# EAGLE board AUVfirstdraft (EAGLE 9.1.2)

Size 254 x 254 mm. Coordinates in mm from the lower left corner, seen from the top.
Outline: 0,0 254,0 254,254 0,254 0,0
Copper layers (1*16): Top 0.035mm / dielectric 1.5mm / Bottom 0.035mm
Design rules "default": minimum track width 6mil, minimum drill 0.35mm, track to track 6mil, track to pad 6mil, pad to pad 6mil, via to via 6mil, smd to smd 6mil, copper to edge 40mil, drill to drill 6mil, minimum pad ring 10mil, minimum via ring 8mil, stop-mask expansion 4mil, vias tented up to drill 0mil, thermal gap 10mil

## Footprints (pad centres in the part's own frame; a part is rotated, then mirrored left to right if it is on the bottom)
0204/7 = drill 0.813 long: 1 -3.81,0; 2 3.81,0
TO220V = drill 1.016 long: 1 -2.54,-2.54; 2 0,-2.54; 3 2.54,-2.54
2X05 = drill 1.016 offset: 1 -5.08,-1.27; 2 -5.08,1.27; 3 -2.54,-1.27; 4 -2.54,1.27; 5 0,-1.27; 6 0,1.27; 7 2.54,-1.27; 8 2.54,1.27; 9 5.08,-1.27; 10 5.08,1.27
DC-DC-STEP-DOWN-LM2596 = drill 1.5 pad 2.5 long: IN+ -19.812,8.636; IN- -19.812,-8.636; OUT+ 19.812,8.636; OUT- 19.812,-8.636 | hole 3: -14.478,7.62; 15.24,-7.62
C025-024X044 = drill 0.813 long: 1 -1.27,0; 2 1.27,0
DO41-10 = drill 1.118 pad 1.93 long: A 5.08,0; C -5.08,0
1X04 = drill 1.016 long: 1 -3.81,0; 2 -1.27,0; 3 1.27,0; 4 3.81,0
1X02 = drill 1.016 long: 1 -1.27,0; 2 1.27,0
LED3MM = drill 0.813 pad 1.676 long: A -1.27,0; K 1.27,0
LED5MM = drill 0.813 pad 1.676 long: A -1.27,0; K 1.27,0
TO220V' = drill 1.016 long: 1 -2.54,0; 2 0,0; 3 2.54,0
TSOP3XXX = drill 1 pad 1.93 long: 1 -2.54,0; 2 0,0; 3 2.54,0
DIGITAL_ISOLATOR_MODULE = drill 0.9 pad 1.778 long: 1 2.54,25.4; 2 2.54,22.86; 3 2.54,20.32; 4 2.54,17.78; 5 2.54,15.24; 6 2.54,12.7; 7 2.54,10.16; 8 2.54,7.62; 9 2.54,5.08; 10 2.54,2.54; 11 20.32,2.54; 12 20.32,5.08; 13 20.32,7.62; 14 20.32,10.16; 15 20.32,12.7; 16 20.32,15.24; 17 20.32,17.78; 18 20.32,20.32; 19 20.32,22.86; 20 20.32,25.4
DEANS = drill 1.27 pad 3.556 long: + 0,0; - 0.737,-6.921
1X03 = drill 1.016 long: 1 -2.54,0; 2 0,0; 3 2.54,0
L298MODULE = drill 1.016 pad 1.88 long: 12V 8.89,6.35; 12V1 8.89,1.27; GND 13.97,6.35; GND1 13.97,1.27 | drill 1.016 pad 1.88 offset: IN1 26.67,5.08; IN2 29.21,5.08; IN3 31.75,5.08; IN4 34.29,5.08; IN5 26.67,1.27; IN6 29.21,1.27; IN7 31.75,1.27; IN8 34.29,1.27
1X08 = drill 1.016 long: 1 -8.89,0; 2 -6.35,0; 3 -3.81,0; 4 -1.27,0; 5 1.27,0; 6 3.81,0; 7 6.35,0; 8 8.89,0
2X08 = drill 1.016 offset: 1 -8.89,-1.27; 2 -8.89,1.27; 3 -6.35,-1.27; 4 -6.35,1.27; 5 -3.81,-1.27; 6 -3.81,1.27; 7 -1.27,-1.27; 8 -1.27,1.27; 9 1.27,-1.27; 10 1.27,1.27; 11 3.81,-1.27; 12 3.81,1.27; 13 6.35,-1.27; 14 6.35,1.27; 15 8.89,-1.27; 16 8.89,1.27
1X15 = drill 1.016 long: 1 -17.78,0; 2 -15.24,0; 3 -12.7,0; 4 -10.16,0; 5 -7.62,0; 6 -5.08,0; 7 -2.54,0; 8 0,0; 9 2.54,0; 10 5.08,0; 11 7.62,0; 12 10.16,0; 13 12.7,0; 14 15.24,0; 15 17.78,0
DIL04 = drill 0.813 offset: 1 -1.27,-3.81; 2 1.27,-3.81; 3 1.27,3.81; 4 -1.27,3.81
TO92-EBC = drill 0.813 long: B 0,-1.27; C -2.54,-1.27; E 2.54,-1.27
TO220BV = drill 1.016 long: D 0,-2.54; G -2.54,-2.54; S 2.54,-2.54
DO35Z10 = drill 0.813 long: A 5.08,0; C -5.08,0
1X13 = drill 1.016 long: 1 -15.24,0; 2 -12.7,0; 3 -10.16,0; 4 -7.62,0; 5 -5.08,0; 6 -2.54,0; 7 0,0; 8 2.54,0; 9 5.08,0; 10 7.62,0; 11 10.16,0; 12 12.7,0; 13 15.24,0
ARDUINO_NANO_30PIN = drill 0.9 pad 1.93 long: 3V3 16.51,6.35; +5V 16.51,31.75; A0 16.51,11.43; A1 16.51,13.97; A2 16.51,16.51; A3 16.51,19.05; A4 16.51,21.59; A5 16.51,24.13; A6 16.51,26.67; A7 16.51,29.21; AREF 16.51,8.89; D0/RX 1.27,36.83; D1/TX 1.27,39.37; D2 1.27,29.21; D3 1.27,26.67; D4 1.27,24.13; D5 1.27,21.59; D6 1.27,19.05; D7 1.27,16.51; D8 1.27,13.97; D9 1.27,11.43; D10 1.27,8.89; D11 1.27,6.35; D12 1.27,3.81; D13 16.51,3.81; GND(1) 1.27,31.75; GND(2) 16.51,36.83; RST(1) 1.27,34.29; RST(2) 16.51,34.29; VIN 16.51,39.37 | hole 2: 1.27,41.91; 16.51,41.91; 16.51,1.27; 1.27,1.27
SERVO_CONTROLLER = drill 1 pad 1.93 long: 0 6.35,34.29; 1 6.35,31.75; 2 6.35,29.21; 3 6.35,26.67; 4 6.35,24.13; 5 6.35,21.59; 6 6.35,16.51; 7 6.35,13.97; 8 6.35,11.43; 9 6.35,8.89; 10 6.35,6.35; 11 6.35,3.81; +5V(OUT) 6.35,19.05; ERR 26.67,15.24; GND 26.67,27.94; RST' 26.67,17.78; RX 26.67,22.86; TX 26.67,20.32; TXIN 26.67,12.7; VIN 26.67,25.4; VSRV 6.35,1.27

## Placement (x,y rotation side)
330Ω  [0204/7]  92.71,153.67 180 top
7805_ESC  7805TV  [TO220V]  35.56,218.44 0 top
7805_NUC  7805TV  [TO220V]  64.77,209.55 0 top
7806_NUC  7805TV  [TO220V]  52.07,209.55 0 top
BATTERY_MONITERING  [2X05]  93.98,205.74 270 top
BOOST_24V_NUC  DC-DC-STEP-DOWN-LM2596  [DC-DC-STEP-DOWN-LM2596]  -25.4,64.77 0 top  (outside the outline)
BUCK_7V_ESC  DC-DC-STEP-DOWN-LM2596  [DC-DC-STEP-DOWN-LM2596]  12.7,156.21 90 top
BUCK_7V_NUC  DC-DC-STEP-DOWN-LM2596  [DC-DC-STEP-DOWN-LM2596]  -27.94,15.24 0 top  (outside the outline)
BUCK_12_NUC  DC-DC-STEP-DOWN-LM2596  [DC-DC-STEP-DOWN-LM2596]  -26.67,40.64 0 top  (outside the outline)
C1  220nF  [C025-024X044]  44.45,201.93 0 top
C2  100nF  [C025-024X044]  49.53,201.93 180 top
C3  220nF  [C025-024X044]  68.58,198.12 180 top
C4  100nF  [C025-024X044]  63.5,198.12 0 top
C5  220nF  [C025-024X044]  41.91,213.36 0 top
C6  100nF  [C025-024X044]  45.72,213.36 180 top
D1  1N4004  [DO41-10]  223.52,149.86 90 top
D6  1N4004  [DO41-10]  219.71,149.86 90 bottom
D7  1N4004  [DO41-10]  45.72,5.08 180 bottom
D8  1N4004  [DO41-10]  33.02,2.54 270 top
DEPTH_SENSOR  [1X04]  128.27,-3.81 180 top  (outside the outline)
ESC_5V_JUMPER  [1X02]  101.6,128.27 180 top
ESC_5V_LED  [LED3MM]  53.34,214.63 0 top
ESC_EMITTER_LED  [LED5MM]  128.27,38.1 90 top
ESC_PMOS  MOSFET-PCHANNELFQP27P06  [TO220V']  3.81,119.38 270 top
FRC  [2X05]  219.71,77.47 90 top
IR_RECIEVER  TSOP34X  [TSOP3XXX]  125.73,20.32 0 top
ISOLATION_CIRCUIT  DIGITAL_ISOLATOR  [DIGITAL_ISOLATOR_MODULE]  212.09,66.04 90 top
J1  [DEANS]  5.08,5.08 180 top
L298_JUMPER_1  [1X03]  198.12,191.77 270 top
L298_JUMPER_2  [1X03]  224.79,194.31 270 top
L298_MOTOR_DRIVER  L298MODULE  [L298MODULE]  215.9,162.56 90 top
LOAD_CONNECTORS  [1X08]  125.73,142.24 90 top
LOAD_NMOS_JUMPER  [2X08]  162.56,139.7 90 top
LOAD_POWER_PINS  [1X08]  182.88,142.24 0 top
NANO_5V_JUMPER  [1X02]  162.56,62.23 0 top
NANO_ESC_LED  [LED3MM]  160.02,6.35 0 top
NANO_NUC_LED  [LED3MM]  115.57,5.08 180 bottom
NUC_5V_JUMPER  [1X04]  54.61,54.61 270 top
NUC_5V_LED  [LED3MM]  60.96,194.31 0 top
NUC_12V_JUMPER  [1X04]  6.35,104.14 90 top
NUC_GND  [1X04]  5.08,24.13 90 top
NUC_NANO-CONNECTORS_2  [1X15]  74.93,22.86 90 top
NUC_NANO_CONNECTORS_1  [1X15]  110.49,22.86 270 top
NUC_PMOS  MOSFET-PCHANNELFQP27P06  [TO220V']  -8.89,-6.35 90 top  (outside the outline)
PMOS_OPTOCOUPLER  PC817  [DIL04]  121.92,118.11 90 top
Q3  BC548  [TO92-EBC]  41.91,160.02 270 top
Q4  IRF540  [TO220BV]  217.17,160.02 180 top
Q5  IRF540  [TO220BV]  228.6,160.02 180 top
Q6  IRF540  [TO220BV]  194.31,160.02 180 top
Q7  IRF540  [TO220BV]  138.43,130.81 180 top
Q9  IRF540  [TO220BV]  138.43,125.73 180 top
Q10  IRF540  [TO220BV]  205.74,160.02 180 top
Q11  IRF540  [TO220BV]  171.45,160.02 180 top
Q12  IRF540  [TO220BV]  182.88,160.02 180 top
R1  [0204/7]  21.59,3.81 0 top
R2  [0204/7]  21.59,1.27 180 top
R3  330Ω  [0204/7]  69.85,193.04 180 top
R4  10k  [0204/7]  165.1,134.62 0 bottom
R5  10KΩ  [0204/7]  228.6,158.75 180 top
R6  330Ω  [0204/7]  120.65,7.62 270 top
R7  10KΩ  [0204/7]  30.48,20.32 90 top
R9  22k  [0204/7]  83.82,215.9 180 top
R10  39k  [0204/7]  83.82,213.36 180 top
R11  22k  [0204/7]  83.82,210.82 180 top
R12  22k  [0204/7]  83.82,208.28 180 top
R13  33k  [0204/7]  83.82,205.74 180 top
R14  18k  [0204/7]  83.82,203.2 180 top
R15  47k  [0204/7]  83.82,200.66 180 top
R16  10k  [0204/7]  83.82,198.12 180 top
R17  18k  [0204/7]  110.49,196.85 0 top
R18  56k  [0204/7]  110.49,199.39 0 top
R19  18k  [0204/7]  110.49,201.93 0 top
R20  39k  [0204/7]  110.49,204.47 0 top
R21  22k  [0204/7]  110.49,207.01 0 top
R22  22k  [0204/7]  110.49,209.55 0 top
R23  22k  [0204/7]  110.49,212.09 0 top
R24  18k  [0204/7]  110.49,214.63 0 top
R25  330Ω  [0204/7]  165.1,10.16 270 top
R26  10KΩ  [0204/7]  160.02,158.75 180 top
R27  10KΩ  [0204/7]  148.59,158.75 180 top
R29  10KΩ  [0204/7]  119.38,99.06 90 top
R30  330Ω  [0204/7]  91.44,149.86 180 top
R31  330Ω  [0204/7]  48.26,170.18 0 top
R32  10k  [0204/7]  167.64,139.7 180 top
R33  330Ω  [0204/7]  135.89,34.29 270 top
R34  10KΩ  [0204/7]  217.17,158.75 0 bottom
R35  10KΩ  [0204/7]  194.31,158.75 180 top
R36  10KΩ  [0204/7]  205.74,158.75 180 top
R37  10KΩ  [0204/7]  171.45,158.75 180 top
R38  10KΩ  [0204/7]  182.88,158.75 180 top
R39  330Ω  [0204/7]  49.53,222.25 0 top
REED_SWITCH  [1X03]  24.13,20.32 270 top
SCHOTKKY_DIODE  1N821  [DO35Z10]  38.1,20.32 270 top
SERVO_JUMPER  [1X13]  196.85,26.67 180 top
THRUSTER_ENABLE_JUMPER  [1X02]  158.75,125.73 180 top
THRUSTER_ENABLE_LED  [LED3MM]  44.45,165.1 270 top
THRUSTER_ENABLE_OPTOCOUPLER  PC817  [DIL04]  69.85,166.37 180 top
U$1  ARDUINO(NANO_3.0)  [ARDUINO_NANO_30PIN]  86.36,1.27 0 top
U$4  SERVO_CONTROLLER  [SERVO_CONTROLLER]  218.44,35.56 90 top
U$6  ARDUINO(NANO_3.0)  [ARDUINO_NANO_30PIN]  138.43,2.54 0 top

## Library data of the parts
330Ω R1-R7 R9-R27 R29-R39 = resistor
7805_ESC 7805_NUC 7806_NUC = linear
BATTERY_MONITERING DEPTH_SENSOR ESC_5V_JUMPER FRC L298_JUMPER_1 L298_JUMPER_2 LOAD_CONNECTORS LOAD_NMOS_JUMPER LOAD_POWER_PINS NANO_5V_JUMPER NUC_5V_JUMPER NUC_12V_JUMPER NUC_GND NUC_NANO-CONNECTORS_2 NUC_NANO_CONNECTORS_1 REED_SWITCH SERVO_JUMPER THRUSTER_ENABLE_JUMPER = pinhead
BOOST_24V_NUC BUCK_7V_ESC BUCK_7V_NUC BUCK_12_NUC = diy-modules
C1-C6 = rcl
D1 D6-D8 ESC_5V_LED ESC_EMITTER_LED NANO_ESC_LED NANO_NUC_LED NUC_5V_LED THRUSTER_ENABLE_LED = adafruit
ESC_PMOS NUC_PMOS = SparkFun-DiscreteSemi
IR_RECIEVER = CEDT_JANUARY_2015_v5
ISOLATION_CIRCUIT = ISO7330C DIGITAL ISOLATOR MODULE
J1 = SparkFun-Connectors; SF_ID: PRT-11864
L298_MOTOR_DRIVER = l298module
PMOS_OPTOCOUPLER THRUSTER_ENABLE_OPTOCOUPLER = optocoupler; MPN: PC817X4J000F; OC_FARNELL: 9707727; OC_NEWARK: 97K7059
Q3 = transistor-npn
Q4-Q7 Q9-Q12 = transistor-power
SCHOTKKY_DIODE = diode
U$1 U$6 = Arduino_Nano_3
U$4 = Servo Controller

## Nets
5V_DIODE: NANO_5V_JUMPER.2 SCHOTKKY_DIODE.C
DEPTH_SCL: DEPTH_SENSOR.3 NUC_NANO_CONNECTORS_1.7 U$1.A5
DEPTH_SDA: DEPTH_SENSOR.4 NUC_NANO_CONNECTORS_1.8 U$1.A4
DIFFUSED_1: LOAD_NMOS_JUMPER.10 Q6.G R35.1
DIFFUSED_2: LOAD_NMOS_JUMPER.12 Q10.G R36.1
DIFFUSED_LIGHT_1_NANO: LOAD_NMOS_JUMPER.9 NUC_NANO-CONNECTORS_2.7 U$1.D6
DIFFUSED_LIGHT_2_NANO: LOAD_NMOS_JUMPER.11 NUC_NANO-CONNECTORS_2.8 U$1.D5
DL1: LOAD_CONNECTORS.8 Q6.D
DL2: LOAD_CONNECTORS.7 Q10.D
DP1: D1.A LOAD_CONNECTORS.4 Q4.D
DP2: D6.A LOAD_CONNECTORS.3 Q5.D
DROPPER_1: LOAD_NMOS_JUMPER.14 Q4.G R34.1
DROPPER_1_NANO: LOAD_NMOS_JUMPER.13 NUC_NANO-CONNECTORS_2.9 U$1.D4
DROPPER_2: LOAD_NMOS_JUMPER.16 Q5.G R5.1
DROPPER_2_NANO: LOAD_NMOS_JUMPER.15 NUC_NANO_CONNECTORS_1.9 U$1.A3
ESC_1_SIGNAL: FRC.2 ISOLATION_CIRCUIT.18
ESC_2_SIGNAL: FRC.4 ISOLATION_CIRCUIT.17
ESC_3_SIGNAL: FRC.6 ISOLATION_CIRCUIT.16
ESC_4_SIGNAL: FRC.8 ISOLATION_CIRCUIT.14
ESC_5_SIGNAL: FRC.10 ISOLATION_CIRCUIT.13
ESC_5V: 7805_ESC.3 C6.1 ESC_5V_JUMPER.2 ESC_5V_LED.A ISOLATION_CIRCUIT.20 R31.2 THRUSTER_ENABLE_JUMPER.1 THRUSTER_ENABLE_OPTOCOUPLER.4
ESC_6_SIGNAL: FRC.9 ISOLATION_CIRCUIT.12
ESC_7V: 7805_ESC.1 BUCK_7V_ESC.OUT+ C5.1
ESC_BATTERY_MAIN: ESC_PMOS.2 FRC.5 R29.1
ESC_CELL_1: BATTERY_MONITERING.2 R24.1
ESC_CELL_1_NANO: R23.2 R24.2 U$6.A0
ESC_CELL_2: BATTERY_MONITERING.4 R22.1
ESC_CELL_2_NANO: R21.2 R22.2 U$6.A1
ESC_CELL_3: BATTERY_MONITERING.6 R20.1
ESC_CELL_3_NANO: R19.2 R20.2 U$6.A2
ESC_CELL_4: BATTERY_MONITERING.8 R18.1
ESC_CELL_4_NANO: R17.2 R18.2 U$6.A3
ESC_GND: 7805_ESC.2 BATTERY_MONITERING.10 BUCK_7V_ESC.IN- BUCK_7V_ESC.OUT- C5.2 C6.2 ESC_EMITTER_LED.K FRC.7 ISOLATION_CIRCUIT.19 PMOS_OPTOCOUPLER.3 Q3.E R4.1 R17.1 R19.1 R21.1 R23.1 R25.1 R32.1 R39.1 U$6.GND(2)
ESC_NANO_D13: NANO_ESC_LED.A U$6.D13
ESC_PMOS: ESC_PMOS.1 PMOS_OPTOCOUPLER.4 R29.2
ESC_POWER: BUCK_7V_ESC.IN+ ESC_PMOS.3
FL1: LOAD_CONNECTORS.6 Q11.D
FL2: LOAD_CONNECTORS.5 Q12.D
FOCUSSED_1: LOAD_NMOS_JUMPER.6 Q11.G R37.1
FOCUSSED_2: LOAD_NMOS_JUMPER.8 Q12.G R38.1
FOCUSSED_LIGHT_1_NANO: LOAD_NMOS_JUMPER.5 NUC_NANO-CONNECTORS_2.5 U$1.D8
FOCUSSED_LIGHT_2_NANO: LOAD_NMOS_JUMPER.7 NUC_NANO-CONNECTORS_2.6 U$1.D7
GRABBER_1_CONTROL_1_NANO: L298_JUMPER_1.2 NUC_NANO-CONNECTORS_2.10 U$1.D3
GRABBER_1_CONTROL_2_NANO: L298_JUMPER_2.2 NUC_NANO-CONNECTORS_2.11 U$1.D2
IN1: L298_JUMPER_1.3 L298_MOTOR_DRIVER.IN1
IN2: L298_JUMPER_2.3 L298_MOTOR_DRIVER.IN2
IN3: L298_JUMPER_1.1 L298_MOTOR_DRIVER.IN3
IN4: L298_JUMPER_2.1 L298_MOTOR_DRIVER.IN4
IR_RECIEVE: IR_RECIEVER.1 NUC_NANO-CONNECTORS_2.2 U$1.D11
N$1: NUC_NANO_CONNECTORS_1.1 U$1.VIN
N$2: NANO_NUC_LED.K R6.2
N$3: NANO_ESC_LED.K R25.2
N$4: R31.1 THRUSTER_ENABLE_LED.A
N$5: ESC_5V_LED.K R39.2
N$6: SERVO_JUMPER.12 U$4.1
N$7: NUC_NANO_CONNECTORS_1.3 U$1.RST(2)
N$8: 330Ω.1 PMOS_OPTOCOUPLER.2
N$9: SERVO_JUMPER.10 U$4.3
N$10: R33.2 U$6.D3
N$11: SERVO_JUMPER.8 U$4.5
N$12: FRC.3
N$13: SERVO_JUMPER.5 U$4.7
N$14: R30.1 THRUSTER_ENABLE_OPTOCOUPLER.2
N$15: SERVO_JUMPER.3 U$4.9
N$16: Q3.C THRUSTER_ENABLE_LED.K
N$17: NUC_NANO_CONNECTORS_1.13 U$1.AREF
N$18: ESC_EMITTER_LED.A R33.1
N$19: SERVO_JUMPER.1 U$4.11
N$20: NUC_NANO-CONNECTORS_2.15 U$1.D1/TX
N$21: NUC_NANO-CONNECTORS_2.14 U$1.D0/RX
N$22: NUC_NANO-CONNECTORS_2.13 U$1.RST(1)
N$23: NUC_NANO-CONNECTORS_2.12 U$1.GND(1)
N$34: NUC_PMOS.1 R1.1 R2.2
N$38: NUC_5V_LED.K R3.2
NANO_5V: NANO_5V_JUMPER.1 NUC_NANO_CONNECTORS_1.4 U$1.+5V
NANO_ESC_5V: ESC_5V_JUMPER.1 U$6.+5V
NUC_3V3: DEPTH_SENSOR.1 NUC_NANO_CONNECTORS_1.14 U$1.3V3
NUC_5V: 7805_NUC.1 C4.1 IR_RECIEVER.2 ISOLATION_CIRCUIT.1 NUC_5V_JUMPER.1 NUC_5V_JUMPER.2 NUC_5V_JUMPER.3 NUC_5V_JUMPER.4 NUC_5V_LED.A PMOS_OPTOCOUPLER.1 R7.1 SCHOTKKY_DIODE.A
NUC_6V: 7806_NUC.3 C2.1 D1.C D6.C LOAD_POWER_PINS.5 LOAD_POWER_PINS.6
NUC_7V: 7805_NUC.3 BUCK_7V_NUC.OUT+ C3.1
NUC_12V: 7806_NUC.1 BUCK_12_NUC.OUT+ C1.1 D7.C D8.C L298_MOTOR_DRIVER.12V LOAD_POWER_PINS.7 LOAD_POWER_PINS.8 NUC_12V_JUMPER.1 NUC_12V_JUMPER.2 NUC_12V_JUMPER.3 NUC_12V_JUMPER.4
NUC_24V: BOOST_24V_NUC.OUT+ LOAD_POWER_PINS.1 LOAD_POWER_PINS.2 LOAD_POWER_PINS.3 LOAD_POWER_PINS.4
NUC_BATTERY_MAIN: J1.+ NUC_PMOS.2 R1.2
NUC_CELL_1: BATTERY_MONITERING.1 R9.1
NUC_CELL_1_NANO: NUC_NANO_CONNECTORS_1.12 R9.2 R10.2 U$1.A0
NUC_CELL_2: BATTERY_MONITERING.3 R11.1
NUC_CELL_2_NANO: NUC_NANO_CONNECTORS_1.11 R11.2 R12.2 U$1.A1
NUC_CELL_3: BATTERY_MONITERING.5 R13.1
NUC_CELL_3_NANO: NUC_NANO_CONNECTORS_1.6 R13.2 R14.2 U$1.A6
NUC_CELL_4: BATTERY_MONITERING.7 R15.1
NUC_CELL_4_NANO: NUC_NANO_CONNECTORS_1.5 R15.2 R16.2 U$1.A7
NUC_GND: 330Ω.2 7805_NUC.2 7806_NUC.2 BATTERY_MONITERING.9 BOOST_24V_NUC.IN- BOOST_24V_NUC.OUT- BUCK_7V_NUC.IN- BUCK_7V_NUC.OUT- BUCK_12_NUC.IN- BUCK_12_NUC.OUT- C1.2 C2.2 C3.2 C4.2 DEPTH_SENSOR.2 IR_RECIEVER.3 ISOLATION_CIRCUIT.2 J1.- L298_MOTOR_DRIVER.GND NUC_GND.1 NUC_GND.2 NUC_GND.3 NUC_GND.4 NUC_NANO_CONNECTORS_1.2 Q4.S Q5.S Q6.S Q7.S Q9.S Q10.S Q11.S Q12.S R3.1 R5.2 R6.1 R10.1 R12.1 R14.1 R16.1 R26.2 R27.2 R30.2 R34.2 R35.2 R36.2 R37.2 R38.2 REED_SWITCH.1 U$1.GND(2) U$4.GND
NUC_NANO_D13: NANO_NUC_LED.A NUC_NANO_CONNECTORS_1.15 U$1.D13
NUC_POWER: BOOST_24V_NUC.IN+ BUCK_7V_NUC.IN+ BUCK_12_NUC.IN+ NUC_PMOS.3
REED_1: NUC_NANO_CONNECTORS_1.10 R7.2 REED_SWITCH.3 U$1.A2
REED_2: R2.1 REED_SWITCH.2
SERVO_1: ISOLATION_CIRCUIT.3 SERVO_JUMPER.13 U$4.0
SERVO_2: ISOLATION_CIRCUIT.4 SERVO_JUMPER.11 U$4.2
SERVO_3: ISOLATION_CIRCUIT.5 SERVO_JUMPER.9 U$4.4
SERVO_4: ISOLATION_CIRCUIT.8 SERVO_JUMPER.6 U$4.6
SERVO_5: ISOLATION_CIRCUIT.9 SERVO_JUMPER.4 U$4.8
SERVO_6: ISOLATION_CIRCUIT.10 SERVO_JUMPER.2 U$4.10
THRUSTER_ENABLE: NUC_NANO-CONNECTORS_2.1 THRUSTER_ENABLE_OPTOCOUPLER.1 U$1.D12
THRUSTER_ENABLE_ESC: FRC.1 ISOLATION_CIRCUIT.15 Q3.B R4.2 R32.2 THRUSTER_ENABLE_JUMPER.2 THRUSTER_ENABLE_OPTOCOUPLER.3
TORPEDO_1: LOAD_NMOS_JUMPER.2 Q9.G R27.1
TORPEDO_1_NANO: LOAD_NMOS_JUMPER.1 NUC_NANO-CONNECTORS_2.3 U$1.D10
TORPEDO_2: LOAD_NMOS_JUMPER.4 Q7.G R26.1
TORPEDO_2_NANO: LOAD_NMOS_JUMPER.3 NUC_NANO-CONNECTORS_2.4 U$1.D9
TP1: D8.A LOAD_CONNECTORS.2 Q9.D
TP2: D7.A LOAD_CONNECTORS.1 Q7.D

## Tracks (layer width: path | path; a pad name or v marks a point on that pad's centre or on a via)
5V_DIODE  (1 unrouted)
DEPTH_SCL  (2 unrouted)
DEPTH_SDA  (2 unrouted)
DIFFUSED_1  (2 unrouted)
DIFFUSED_2  (2 unrouted)
DIFFUSED_LIGHT_1_NANO  (2 unrouted)
DIFFUSED_LIGHT_2_NANO  (2 unrouted)
DL1  (1 unrouted)
DL2  (1 unrouted)
DP1  (2 unrouted)
DP2  (2 unrouted)
DROPPER_1  (2 unrouted)
DROPPER_1_NANO  (2 unrouted)
DROPPER_2  (2 unrouted)
DROPPER_2_NANO  (2 unrouted)
ESC_1_SIGNAL  (1 unrouted)
ESC_2_SIGNAL  (1 unrouted)
ESC_3_SIGNAL  (1 unrouted)
ESC_4_SIGNAL  (1 unrouted)
ESC_5_SIGNAL  (1 unrouted)
ESC_5V  (7 unrouted)
ESC_6_SIGNAL  (1 unrouted)
ESC_7V  (2 unrouted)
ESC_BATTERY_MAIN  (2 unrouted)
ESC_CELL_1  (1 unrouted)
ESC_CELL_1_NANO  (2 unrouted)
ESC_CELL_2  (1 unrouted)
ESC_CELL_2_NANO  (2 unrouted)
ESC_CELL_3  (1 unrouted)
ESC_CELL_3_NANO  (2 unrouted)
ESC_CELL_4  (1 unrouted)
ESC_CELL_4_NANO  (2 unrouted)
ESC_GND  (19 unrouted)
ESC_NANO_D13  (1 unrouted)
ESC_PMOS  (2 unrouted)
ESC_POWER  (1 unrouted)
FL1  (1 unrouted)
FL2  (1 unrouted)
FOCUSSED_1  (2 unrouted)
FOCUSSED_2  (2 unrouted)
FOCUSSED_LIGHT_1_NANO  (2 unrouted)
FOCUSSED_LIGHT_2_NANO  (2 unrouted)
GRABBER_1_CONTROL_1_NANO  (2 unrouted)
GRABBER_1_CONTROL_2_NANO  (2 unrouted)
IN1  (1 unrouted)
IN2  (1 unrouted)
IN3  (1 unrouted)
IN4  (1 unrouted)
IR_RECIEVE  (2 unrouted)
N$1  (1 unrouted)
N$2  (1 unrouted)
N$3  (1 unrouted)
N$4  (1 unrouted)
N$5  (1 unrouted)
N$6  (1 unrouted)
N$7  (1 unrouted)
N$8  (1 unrouted)
N$9  (1 unrouted)
N$10  (1 unrouted)
N$11  (1 unrouted)
N$13  (1 unrouted)
N$14  (1 unrouted)
N$15  (1 unrouted)
N$16  (1 unrouted)
N$17  (1 unrouted)
N$18  (1 unrouted)
N$19  (1 unrouted)
N$20  (1 unrouted)
N$21  (1 unrouted)
N$22  (1 unrouted)
N$23  (1 unrouted)
N$34  (2 unrouted)
N$38  (1 unrouted)
NANO_5V  (2 unrouted)
NANO_ESC_5V  (1 unrouted)
NUC_3V3  (2 unrouted)
NUC_5V  (11 unrouted)
NUC_6V  (5 unrouted)
NUC_7V  (2 unrouted)
NUC_12V  (11 unrouted)
NUC_24V  (4 unrouted)
NUC_BATTERY_MAIN  (2 unrouted)
NUC_CELL_1  (1 unrouted)
NUC_CELL_1_NANO  (3 unrouted)
NUC_CELL_2  (1 unrouted)
NUC_CELL_2_NANO  (3 unrouted)
NUC_CELL_3  (1 unrouted)
NUC_CELL_3_NANO  (3 unrouted)
NUC_CELL_4  (1 unrouted)
NUC_CELL_4_NANO  (3 unrouted)
NUC_GND  (49 unrouted)
NUC_NANO_D13  (2 unrouted)
NUC_POWER  (3 unrouted)
REED_1  (3 unrouted)
REED_2  (1 unrouted)
SERVO_1  (2 unrouted)
SERVO_2  (2 unrouted)
SERVO_3  (2 unrouted)
SERVO_4  (2 unrouted)
SERVO_5  (2 unrouted)
SERVO_6  (2 unrouted)
THRUSTER_ENABLE  (2 unrouted)
THRUSTER_ENABLE_ESC  (6 unrouted)
TORPEDO_1  (2 unrouted)
TORPEDO_1_NANO  (2 unrouted)
TORPEDO_2  (2 unrouted)
TORPEDO_2_NANO  (2 unrouted)
TP1  (2 unrouted)
TP2  (2 unrouted)